# Altium PCB pcb.PcbDoc (part 2 of 2)
Units mm, origin at the board's own origin, x right, y up, seen from the top; angles counter-clockwise.
Board outline 343 x 129 mm, 4 copper layers (Top Layer, Layer 1 3V3, Layer 2 GND, Bottom Layer), stack 1.564 mm thick; 191 components, 119 nets, 712 pads, 390 vias.
Unrouted connection lines stored in the file: 301.
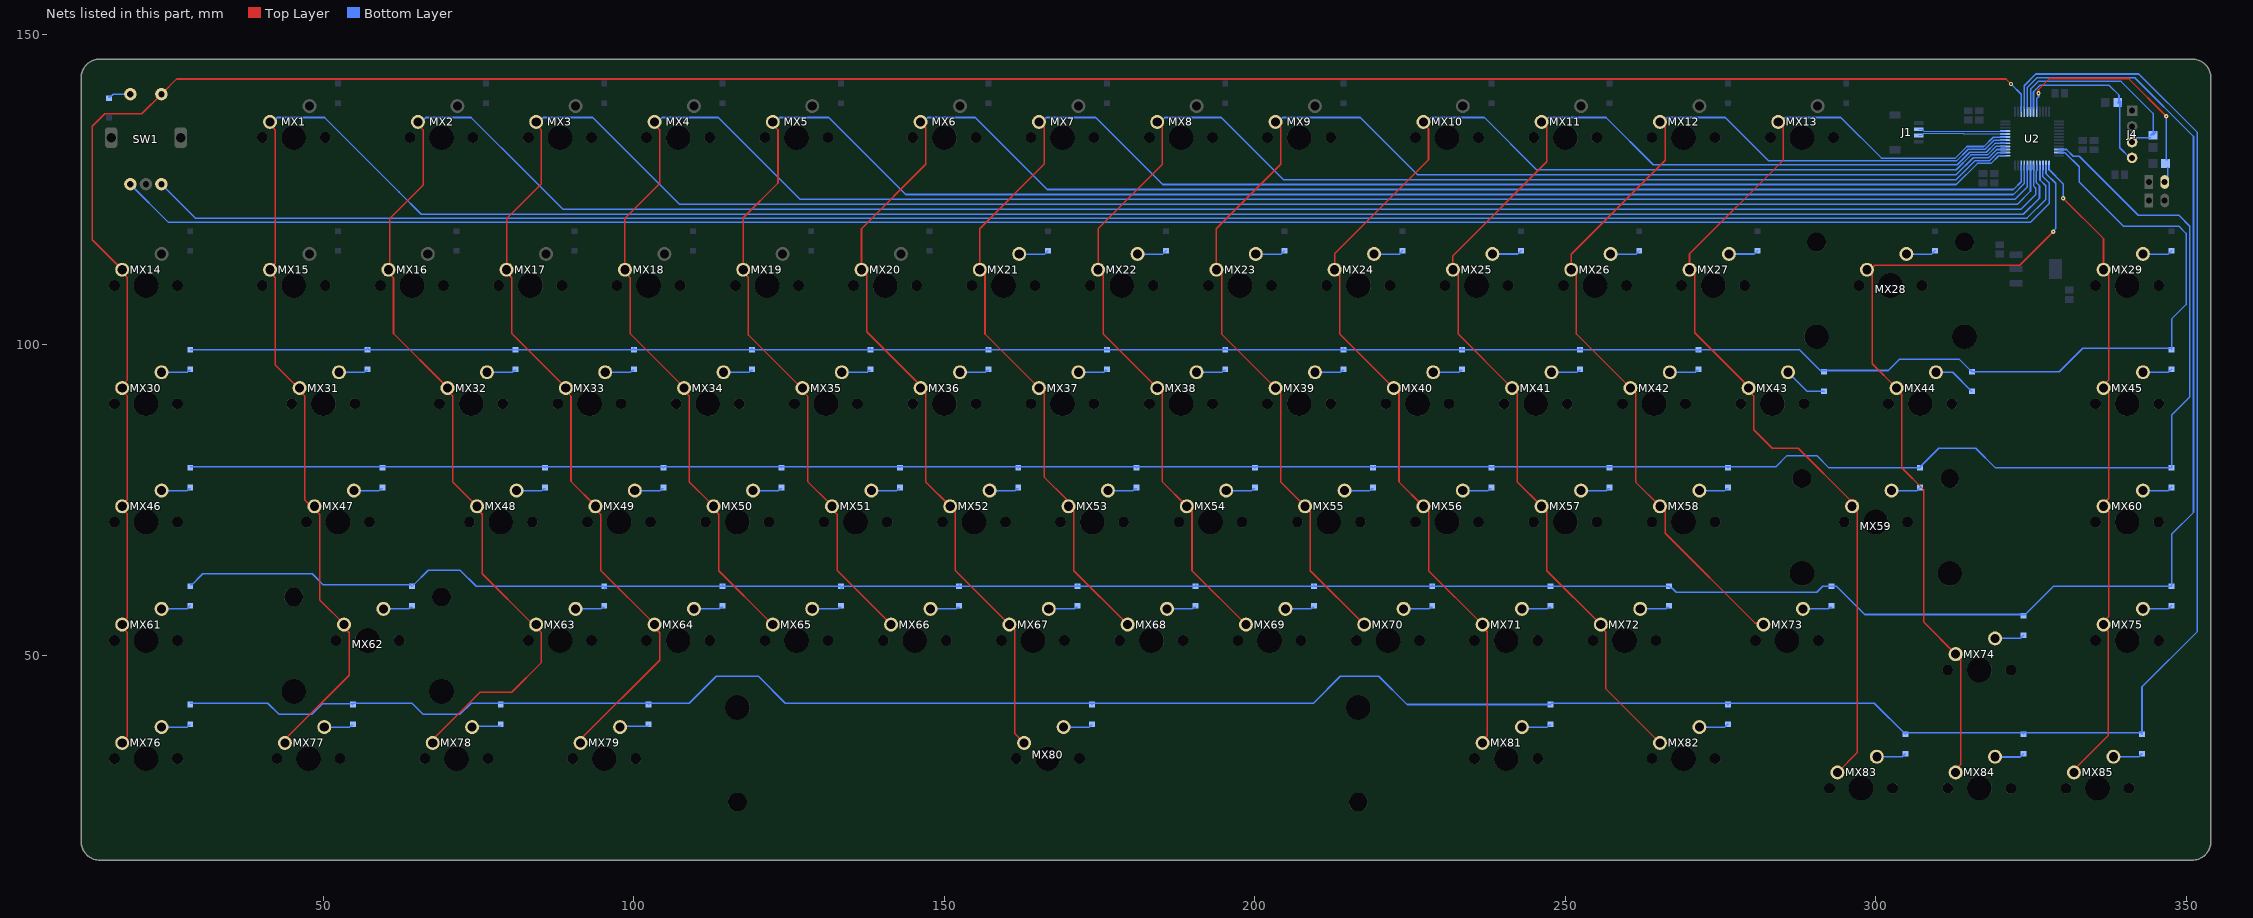
[diagram p4: the nets of this part, all layers, seen from the top]

## Via types
v1: diameter 0.7, hole 0.3, Layer 2 GND to Bottom Layer, tented both sides, 284 vias
v2: diameter 0.7, hole 0.3, Top Layer to Layer 2 GND, tented both sides, 91 vias
v3: diameter 0.7, hole 0.3, Layer 1 3V3 to Bottom Layer, tented both sides, 8 vias
v4: diameter 0.7, hole 0.3, Top Layer to Bottom Layer, tented both sides, 7 vias

## Nets (pads, with @x,y where several pads share a name; then routed paths per layer and width w, separated by ;. In a path a pad name is that pad's centre, name@x,y a point inside that pad or via, vN(x,y) a via of type N, cw(c..) or ccw(c..) an arc to the next point about the centre after c; other vN are vias at no path point) (continued)
NetD21_1: D21.1 MX21.2 | length 4.5
  Bottom Layer w0.254: MX21.2@162.52,114.3 162.82,114.6 166.181,114.6 166.339,114.758 166.339,114.783 166.663,115.106 D21.1@166.688,115.106
NetD22_1: D22.1 MX22.2 | length 4.7
  Bottom Layer w0.254: MX22.2@181.275,114.6 185.231,114.6 185.389,114.758 185.389,114.783 185.713,115.106 D22.1@185.737,115.106
NetD23_1: D23.1 MX23.2 | length 4.5
  Bottom Layer w0.254: MX23.2@200.62,114.3 200.92,114.6 204.281,114.6 204.439,114.758 204.439,114.783 204.763,115.106 D23.1@204.787,115.106
NetD24_1: D24.1 MX24.2 | length 4.7
  Bottom Layer w0.254: MX24.2@219.375,114.6 223.331,114.6 223.489,114.758 223.489,114.783 223.813,115.106 D24.1@223.837,115.106
NetD25_1: D25.1 MX25.2 | length 4.8
  Bottom Layer w0.254: MX25.2@238.284,114.617 242.391,114.617 242.539,114.766 242.539,114.783 242.863,115.106 D25.1@242.887,115.106
NetD26_1: D26.1 MX26.2 | length 4.7
  Bottom Layer w0.254: MX26.2@257.475,114.6 261.431,114.6 261.589,114.758 261.589,114.783 261.913,115.106 D26.1@261.938,115.106
NetD27_1: D27.1 MX27.2 | length 5.5
  Bottom Layer w0.254: MX27.2@275.629,114.3 MX27.2@276.113,114.783 ; MX27.2@276.384,114.617 280.491,114.617 280.639,114.766 280.639,114.783 280.963,115.106 D27.1@280.988,115.106
NetD28_1: D28.1 MX28.2 | length 4.7
  Bottom Layer w0.254: MX28.2@305.1,114.6 309.056,114.6 309.214,114.758 309.214,114.783 309.538,115.106 D28.1@309.562,115.106
NetD29_1: D29.1 MX29.2 | length 4.7
  Bottom Layer w0.254: MX29.2@343.2,114.6 347.156,114.6 347.314,114.758 347.314,114.783 347.638,115.106 D29.1@347.662,115.106
NetD30_1: D30.1 MX30.2 | length 4.7
  Bottom Layer w0.254: MX30.2@23.971,95.567 28.078,95.567 28.227,95.716 28.227,95.733 28.339,95.845 D30.1@28.575,95.845
NetD30_2: D30.2 D31.2 D32.2 D33.2 D34.2 D35.2 D36.2 D37.2 D38.2 D39.2 D40.2 D41.2 D42.2 D43.2 D44.2 D45.2 U2.11 | length 371.6
  Bottom Layer w0.254: D30.2@28.575,99.206 56.939,99.206 57.15,99.417 57.361,99.206 D32.2@80.963,99.206 99.802,99.206 D33.2@100.012,99.417 ; D33.2@100.013,99.206 118.852,99.206 D34.2@119.062,99.417 ; D34.2@119.063,99.206 137.902,99.206 D35.2@138.112,99.417 ; D35.2@138.113,99.206 156.952,99.206 D36.2@157.162,99.417 ; D36.2@157.163,99.206 176.001,99.206 D37.2@176.212,99.417 ; D37.2@176.213,99.206 195.051,99.206 D38.2@195.262,99.417 ; D38.2@195.263,99.206 214.101,99.206 D39.2@214.312,99.417 ; D39.2@214.313,99.206 233.151,99.206 D40.2@233.362,99.417 ; D40.2@233.363,99.206 252.201,99.206 D41.2@252.412,99.417 ; D41.2@252.413,99.206 271.078,99.206 D42.2@271.462,98.822 ; D42.2@271.463,99.206 287.747,99.206 291.108,95.845 302.019,95.845 303.805,97.631 313.494,97.631 315.28,95.845 D44.2@315.515,95.845 ; D44.2@315.516,95.634 329.574,95.634 333.357,99.417 D45.2@347.662,99.417 ; U2.11@329.523,130.945 329.532,130.936 330.506,130.936 332.779,128.663 332.779,126.206 339.923,119.062 348.853,119.062 350,117.915 350,106.471 347.663,104.133 D45.2@347.663,99.417 ; D45.2@347.663,99.206 D45.2@347.663,99.417
NetD31_1: D31.1 MX31.2 | length 4.7
  Bottom Layer w0.254: MX31.2@52.546,95.567 56.636,95.567 56.914,95.845 D31.1@57.15,95.845
NetD32_1: D32.1 MX32.2 | length 4.7
  Bottom Layer w0.254: MX32.2@76.359,95.567 80.449,95.567 80.726,95.845 D32.1@80.962,95.845
NetD33_1: D33.1 MX33.2 | length 4.7
  Bottom Layer w0.254: MX33.2@95.409,95.567 99.499,95.567 99.776,95.845 D33.1@100.012,95.845
NetD34_1: D34.1 MX34.2 | length 4.7
  Bottom Layer w0.254: MX34.2@114.459,95.567 118.549,95.567 118.826,95.845 D34.1@119.062,95.845
NetD35_1: D35.1 MX35.2 | length 4.7
  Bottom Layer w0.254: MX35.2@133.509,95.567 137.616,95.567 137.764,95.716 137.764,95.733 137.876,95.845 D35.1@138.112,95.845
NetD36_1: D36.1 MX36.2 | length 4.7
  Bottom Layer w0.254: MX36.2@152.559,95.567 156.649,95.567 156.926,95.845 D36.1@157.162,95.845
NetD37_1: D37.1 MX37.2 | length 4.7
  Bottom Layer w0.254: MX37.2@171.609,95.567 175.699,95.567 175.976,95.845 D37.1@176.212,95.845
NetD38_1: D38.1 MX38.2 | length 4.7
  Bottom Layer w0.254: MX38.2@190.659,95.567 194.749,95.567 195.026,95.845 D38.1@195.262,95.845
NetD39_1: D39.1 MX39.2 | length 4.7
  Bottom Layer w0.254: MX39.2@209.709,95.567 213.799,95.567 214.076,95.845 D39.1@214.312,95.845
NetD40_1: D40.1 MX40.2 | length 4.7
  Bottom Layer w0.254: MX40.2@228.759,95.567 232.849,95.567 233.126,95.845 D40.1@233.362,95.845
NetD41_1: D41.1 MX41.2 | length 4.7
  Bottom Layer w0.254: MX41.2@247.809,95.567 251.899,95.567 252.176,95.845 D41.1@252.412,95.845
NetD42_1: D42.1 MX42.2 | length 4.7
  Bottom Layer w0.254: MX42.2@266.859,95.567 270.966,95.567 271.114,95.716 271.114,95.733 271.226,95.845 D42.1@271.462,95.845
NetD43_1: D43.1 MX43.2 | length 7.1
  Bottom Layer w0.254: MX43.2@285.75,95.25 286.226,95.25 288.992,92.484 D43.1@291.703,92.484
NetD44_1: D44.1 MX44.2 | length 7.4
  Bottom Layer w0.254: MX44.2@309.562,95.25 309.88,95.567 312.408,95.567 315.491,92.484 D44.1@315.516,92.484
NetD45_1: D45.1 MX45.2 | length 4.6
  Bottom Layer w0.254: MX45.2@343.25,95.6 347.181,95.6 347.638,96.056 D45.1@347.662,96.056
NetD46_1: D46.1 MX46.2 | length 4.7
  Bottom Layer w0.254: MX46.2@23.971,76.517 28.078,76.517 28.227,76.666 28.227,76.683 28.339,76.795 D46.1@28.575,76.795
NetD46_2: D46.2 D47.2 D48.2 D49.2 D50.2 D51.2 D52.2 D53.2 D54.2 D55.2 D56.2 D57.2 D58.2 D59.2 D60.2 U2.10 | length 391.3
  Bottom Layer w0.254: D46.2@28.575,80.367 85.514,80.367 D48.2@85.725,80.156 85.936,80.367 104.564,80.367 D49.2@104.775,80.156 104.986,80.367 123.614,80.367 D50.2@123.825,80.156 ; D50.2@123.825,80.367 142.664,80.367 D51.2@142.875,80.156 ; D51.2@142.875,80.367 161.714,80.367 D52.2@161.925,80.156 162.136,80.367 180.764,80.367 D53.2@180.975,80.156 181.186,80.367 199.814,80.367 D54.2@200.025,80.156 200.236,80.367 218.864,80.367 D55.2@219.075,80.156 219.286,80.367 237.914,80.367 D56.2@238.125,80.156 238.336,80.367 256.964,80.367 D57.2@257.175,80.156 ; D57.2@257.175,80.367 276.014,80.367 D58.2@276.225,80.156 ; D58.2@276.225,80.367 283.964,80.367 285.75,82.153 290.512,82.153 292.509,80.156 307.181,80.156 307.181,80.367 310.158,83.344 316.111,83.344 319.298,80.156 D60.2@347.663,80.156 347.663,88.663 350.6,91.6 350.6,119.101 348.853,120.848 342.304,120.848 332.779,130.373 331.822,130.373 330.75,131.445 U2.10@329.523,131.445
NetD47_1: D47.1 MX47.2 | length 4.7
  Bottom Layer w0.254: MX47.2@54.927,76.517 59.018,76.517 59.295,76.795 D47.1@59.531,76.795
NetD48_1: D48.1 MX48.2 | length 4.7
  Bottom Layer w0.254: MX48.2@81.121,76.517 85.211,76.517 85.489,76.795 D48.1@85.725,76.795
NetD49_1: D49.1 MX49.2 | length 4.7
  Bottom Layer w0.254: MX49.2@100.171,76.517 104.261,76.517 104.539,76.795 D49.1@104.775,76.795
NetD50_1: D50.1 MX50.2 | length 4.7
  Bottom Layer w0.254: MX50.2@119.221,76.517 123.328,76.517 123.477,76.666 123.477,76.683 123.589,76.795 D50.1@123.825,76.795
NetD51_1: D51.1 MX51.2 | length 4.7
  Bottom Layer w0.254: MX51.2@138.271,76.517 142.361,76.517 142.639,76.795 D51.1@142.875,76.795
NetD52_1: D52.1 MX52.2 | length 4.7
  Bottom Layer w0.254: MX52.2@157.321,76.517 161.428,76.517 161.577,76.666 161.577,76.683 161.689,76.795 D52.1@161.925,76.795
NetD53_1: D53.1 MX53.2 | length 4.7
  Bottom Layer w0.254: MX53.2@176.371,76.517 180.461,76.517 180.739,76.795 D53.1@180.975,76.795
NetD54_1: D54.1 MX54.2 | length 4.7
  Bottom Layer w0.254: MX54.2@195.421,76.517 199.511,76.517 199.789,76.795 D54.1@200.025,76.795
NetD55_1: D55.1 MX55.2 | length 4.7
  Bottom Layer w0.254: MX55.2@214.471,76.517 218.561,76.517 218.839,76.795 D55.1@219.075,76.795
NetD56_1: D56.1 MX56.2 | length 4.7
  Bottom Layer w0.254: MX56.2@233.521,76.517 237.611,76.517 237.889,76.795 D56.1@238.125,76.795
NetD57_1: D57.1 MX57.2 | length 4.7
  Bottom Layer w0.254: MX57.2@252.571,76.517 256.678,76.517 256.827,76.666 256.827,76.683 256.939,76.795 D57.1@257.175,76.795
NetD58_1: D58.1 MX58.2 | length 4.7
  Bottom Layer w0.254: MX58.2@271.621,76.517 275.728,76.517 275.877,76.666 275.877,76.683 275.989,76.795 D58.1@276.225,76.795
NetD59_1: D59.1 MX59.2 | length 4.8
  Bottom Layer w0.254: MX59.2@302.577,76.517 306.684,76.517 306.833,76.666 306.833,76.683 307.156,77.006 D59.1@307.181,77.006
NetD60_1: D60.1 MX60.2 | length 4.8
  Bottom Layer w0.254: MX60.2@343.059,76.517 347.166,76.517 347.314,76.666 347.314,76.683 347.638,77.006 D60.1@347.662,77.006
NetD61_1: D61.1 MX61.2 | length 4.8
  Bottom Layer w0.254: MX61.2@23.971,57.468 28.078,57.468 28.227,57.616 28.227,57.633 28.55,57.956 D61.1@28.575,57.956
NetD61_2: D61.2 D62.2 D63.2 D64.2 D65.2 D66.2 D67.2 D68.2 D69.2 D70.2 D71.2 D72.2 D73.2 D74.2 D75.2 U2.41 | length 436.2
  Bottom Layer w0.254: D61.2@28.575,61.317 28.811,61.317 30.597,63.103 48.22,63.103 50.006,61.317 64.083,61.317 D62.2@64.294,61.106 ; D62.2@64.53,61.317 66.911,63.698 72.033,63.698 74.625,61.106 D63.2@95.25,61.106 ; D63.2@95.25,60.722 95.634,61.106 D64.2@114.3,61.106 ; D64.2@114.3,61.317 114.511,61.106 D65.2@133.35,61.106 ; D65.2@133.35,60.722 133.734,61.106 D66.2@152.4,61.106 ; D66.2@152.4,61.317 152.611,61.106 D67.2@171.45,61.106 ; D67.2@171.45,61.317 171.661,61.106 D68.2@190.5,61.106 ; D68.2@190.5,61.317 190.711,61.106 D69.2@209.55,61.106 ; D69.2@209.55,61.317 209.761,61.106 D70.2@228.6,61.106 ; D70.2@228.6,61.317 228.811,61.106 D71.2@247.65,61.106 ; D71.2@247.861,61.106 D72.2@266.7,61.106 ; D72.2@266.713,61.119 267.048,60.783 267.234,60.783 267.89,60.127 290.512,60.127 291.492,61.106 D73.2@292.894,61.106 293.694,61.106 298.245,56.555 324.086,56.555 328.638,61.106 D75.2@347.663,61.106 347.663,69.463 351.2,73 351.2,133.534 341.734,143 326,143 324.448,141.448 U2.41@324.448,138.116
NetD62_1: D62.1 MX62.2 | length 4.7
  Bottom Layer w0.254: MX62.2@59.69,57.468 63.78,57.468 64.058,57.745 D62.1@64.294,57.745
NetD63_1: D63.1 MX63.2 | length 4.7
  Bottom Layer w0.254: MX63.2@90.646,57.468 94.736,57.468 95.014,57.745 D63.1@95.25,57.745
NetD64_1: D64.1 MX64.2 | length 4.7
  Bottom Layer w0.254: MX64.2@109.696,57.468 113.803,57.468 113.952,57.616 113.952,57.633 114.064,57.745 D64.1@114.3,57.745
NetD65_1: D65.1 MX65.2 | length 4.7
  Bottom Layer w0.254: MX65.2@128.746,57.468 132.853,57.468 133.002,57.616 133.002,57.633 133.114,57.745 D65.1@133.35,57.745
NetD66_1: D66.1 MX66.2 | length 4.7
  Bottom Layer w0.254: MX66.2@147.796,57.468 151.903,57.468 152.052,57.616 152.052,57.633 152.164,57.745 D66.1@152.4,57.745
NetD67_1: D67.1 MX67.2 | length 4.7
  Bottom Layer w0.254: MX67.2@166.846,57.468 170.936,57.468 171.214,57.745 D67.1@171.45,57.745
NetD68_1: D68.1 MX68.2 | length 4.7
  Bottom Layer w0.254: MX68.2@185.896,57.468 189.986,57.468 190.264,57.745 D68.1@190.5,57.745
NetD69_1: D69.1 MX69.2 | length 4.7
  Bottom Layer w0.254: MX69.2@204.946,57.468 209.036,57.468 209.314,57.745 D69.1@209.55,57.745
NetD70_1: D70.1 MX70.2 | length 4.7
  Bottom Layer w0.254: MX70.2@223.996,57.468 228.086,57.468 228.364,57.745 D70.1@228.6,57.745
NetD71_1: D71.1 MX71.2 | length 4.7
  Bottom Layer w0.254: MX71.2@243.046,57.468 247.153,57.468 247.302,57.616 247.302,57.633 247.414,57.745 D71.1@247.65,57.745
NetD72_1: D72.1 MX72.2 | length 4.7
  Bottom Layer w0.254: MX72.2@262.096,57.468 266.186,57.468 266.464,57.745 D72.1@266.7,57.745
NetD73_1: D73.1 MX73.2 | length 4.7
  Bottom Layer w0.254: MX73.2@288.29,57.468 292.38,57.468 292.658,57.745 D73.1@292.894,57.745
NetD74_1: D74.1 MX74.2 | length 4.8
  Bottom Layer w0.254: MX74.2@319.246,52.705 323.353,52.705 323.502,52.854 323.502,52.871 323.825,53.194 D74.1@323.85,53.194
NetD75_1: D75.1 MX75.2 | length 4.8
  Bottom Layer w0.254: MX75.2@343.059,57.468 347.166,57.468 347.314,57.616 347.314,57.633 347.638,57.956 D75.1@347.662,57.956
NetD76_1: D76.1 MX76.2 | length 4.7
  Bottom Layer w0.254: MX76.2@23.971,38.417 28.061,38.417 28.339,38.695 D76.1@28.575,38.695
NetD76_2: D76.2 D77.2 D78.2 D79.2 D80.2 D81.2 D82.2 D83.2 D84.2 D85.2 U2.40 | length 464.3
  Bottom Layer w0.254: D76.2@28.575,42.267 41.077,42.267 42.862,40.481 48.152,40.481 49.871,42.2 54.625,42.2 D77.2@54.769,42.056 ; D77.2@54.769,42.267 64.294,42.267 66.08,40.481 72.033,40.481 73.819,42.267 102.183,42.267 D79.2@102.394,42.056 ; D79.2@102.394,42.267 108.942,42.267 113.275,46.6 120.087,46.6 124.42,42.267 173.62,42.267 D80.2@173.831,42.056 D80.2@173.831,42.26 ; D80.2@173.831,42.267 209.467,42.267 213.8,46.6 220,46.6 224.544,42.056 D81.2@247.65,42.056 247.861,42.267 276.014,42.267 D82.2@276.225,42.056 276.436,42.267 299.802,42.267 304.775,37.294 D83.2@304.8,37.294 305.011,37.505 323.639,37.505 D84.2@323.744,37.399 ; D84.2@323.85,37.294 D84.2@323.744,37.399 ; U2.40@323.925,138.112 323.925,141.725 325.8,143.6 342.4,143.6 351.829,134.171 351.829,53.829 342.9,44.9 D85.2@342.9,37.505 ; D85.2@342.9,37.294 342.689,37.505 323.85,37.505 D84.2@323.744,37.399
NetD77_1: D77.1 MX77.2 | length 4.7
  Bottom Layer w0.254: MX77.2@50.165,38.417 54.255,38.417 54.533,38.695 D77.1@54.769,38.695
NetD78_1: D78.1 MX78.2 | length 4.7
  Bottom Layer w0.254: MX78.2@73.977,38.417 74.143,38.583 78.469,38.583 D78.1@78.581,38.695
NetD79_1: D79.1 MX79.2 | length 4.7
  Bottom Layer w0.254: MX79.2@97.79,38.417 97.956,38.583 102.282,38.583 D79.1@102.394,38.695
NetD80_1: D80.1 MX80.2 | length 4.7
  Bottom Layer w0.254: MX80.2@169.227,38.417 173.318,38.417 173.595,38.695 D80.1@173.831,38.695
NetD81_1: D81.1 MX81.2 | length 4.7
  Bottom Layer w0.254: MX81.2@243.046,38.417 247.136,38.417 247.414,38.695 D81.1@247.65,38.695
NetD82_1: D82.1 MX82.2 | length 4.8
  Bottom Layer w0.254: MX82.2@271.621,38.417 275.728,38.417 275.877,38.566 275.877,38.583 276.2,38.906 D82.1@276.225,38.906
NetD83_1: D83.1 MX83.2 | length 4.8
  Bottom Layer w0.254: MX83.2@300.196,33.655 304.303,33.655 304.452,33.804 304.452,33.821 304.775,34.144 D83.1@304.8,34.144
NetD84_1: D84.1 MX84.2 | length 4.7
  Bottom Layer w0.254: MX84.2@319.35,33.6 323.306,33.6 323.502,33.796 323.502,33.821 323.825,34.144 D84.1@323.85,34.144
NetD85_1: D85.1 MX85.2 | length 4.8
  Bottom Layer w0.254: MX85.2@338.296,33.655 342.403,33.655 342.552,33.804 342.552,33.821 342.875,34.144 D85.1@342.9,34.144
NetD86_1: D86.1 SW1.S2 | length 3.6
  Bottom Layer w0.254: D86.1@15.478,139.898 15.714,139.898 16.166,140.35 SW1.S2@18.931,140.35
NetJ2_2: J2.2 R3.2 U2.44 | length 36.8
  Top Layer w0.254: v4(326.231,140.494) 326.231,141.089 328.017,142.875 340.725,142.875 v4(346.8,136.8)
  Bottom Layer w0.254: U2.44@325.971,138.112 325.971,139.639 326.231,139.898 v4(326.231,140.494) ; J2.2@346.551,126.206 346.551,126.412 347.067,126.928 R3.2@347.067,128.592 ; v4(346.8,136.8) 346.8,129.806 346.828,129.778 R3.2@347.067,129.778
NetJ4_3: J4.3 R1.1 U2.42 | length 34
  Bottom Layer w0.254: U2.42@324.971,138.112 324.971,141.171 326.2,142.4 339.535,142.4 344.686,137.25 R1.1@344.686,134.136 ; J4.3@341.3,132.628 341.387,132.628 342.109,133.35 R1.1@344.304,133.35 ; R1.1@344.304,133.755 R1.1@344.686,134.136 ; R1.1@344.686,134.136 R1.1@344.686,133.755 345.142,134.211 345.046,134.307 344.857,134.307 R1.1@344.686,134.136
NetJ4_4: J4.4 R2.1 U2.43 | length 30.5
  Bottom Layer w0.254: U2.43@325.425,138.112 325.425,140.738 326.487,141.8 337.6,141.8 339.2,140.2 339.2,139.2 R2.1@339,139 R2.1@339.328,138.672 ; R2.1@339.328,139.237 R2.1@339.328,138.672 ; R2.1@339.484,138.453 R2.1@339.484,139.237 ; R2.1@339.55,138.45 R2.1@339.328,138.672 ; J4.4@341.3,130.088 340.968,130.088 339.328,131.728 R2.1@339.328,138.672
NetMX1_1: MX1.1 MX15.1 MX31.1 MX47.1 MX62.1 MX77.1 U2.17 | length 408.4
  Top Layer w0.254: MX15.1@41.434,112.078 41.434,111.614 42.267,110.781 42.267,96.733 45.972,93.027 MX31.1@46.196,93.027 46.196,92.564 47.03,91.731 47.03,75.009 MX47.1@48.22,73.819 ; MX1.1@41.434,135.89 41.434,135.427 42.267,134.594 42.267,113.109 MX15.1@41.672,112.514 ; MX77.1@43.815,35.877 43.815,36.415 54.173,46.773 54.173,53.631 53.34,54.464 MX62.1@53.34,54.927 ; MX47.1@48.578,73.977 48.578,73.514 49.411,72.681 49.411,58.936 MX62.1@53.578,54.769
  Bottom Layer w0.254: MX1.1@41.434,135.89 41.871,135.89 42.581,136.6 50.2,136.6 62.2,124.6 65.8,121 323.8,121 326.4,123.6 326.4,125.6 325.902,126.098 325.902,127.975 325.925,127.998 325.925,128.16 325.948,128.183 U2.17@325.948,128.87
NetMX2_1: MX2.1 MX16.1 MX32.1 MX48.1 MX63.1 MX78.1 U2.18 | length 396
  Top Layer w0.254: MX16.1@60.484,112.078 60.484,111.614 61.317,110.781 61.317,101.798 MX32.1@69.652,93.464 ; MX16.1@60.722,111.919 60.722,120.322 66.08,125.68 66.08,134.594 65.246,135.427 MX2.1@65.246,135.89 ; MX78.1@67.627,35.877 67.627,36.418 68.163,36.954 68.163,36.963 75.253,44.053 80.367,44.053 85.13,48.816 85.13,53.631 84.296,54.464 MX63.1@84.296,54.769 ; MX32.1@70.009,93.027 70.009,92.564 70.842,91.731 70.842,77.907 74.414,74.335 MX48.1@74.414,73.819 ; MX48.1@74.771,73.977 74.771,73.514 75.605,72.681 75.605,63.103 83.939,54.769 MX63.1@84.296,54.769 ; MX63.1@84.296,54.927 MX63.1@84.296,54.769 ; MX63.1@84.534,54.769 MX63.1@84.296,54.769
  Bottom Layer w0.254: MX2.1@65.246,135.89 65.786,135.89 66.496,136.6 73.8,136.6 83.4,127 88.6,121.8 323.4,121.8 325.8,124.2 325.8,125.2 325.448,125.552 U2.18@325.448,128.87
NetMX3_1: MX3.1 MX17.1 MX33.1 MX49.1 MX64.1 MX79.1 U2.19 | length 370.4
  Top Layer w0.254: MX3.1@84.296,135.89 84.296,135.427 85.13,134.594 85.13,125.93 79.534,120.334 79.534,112.334 MX17.1@79.534,112.078 79.534,111.614 80.367,110.781 80.367,101.798 88.701,93.464 MX33.1@89.297,93.464 ; MX33.1@89.059,93.027 89.059,92.564 89.892,91.731 89.892,77.986 MX49.1@94.059,73.819 ; MX79.1@91.44,35.877 91.44,36.418 91.97,36.947 91.97,36.97 104.18,49.18 104.18,53.631 103.346,54.464 MX64.1@103.346,54.927 ; MX49.1@93.821,73.977 93.821,73.514 94.655,72.681 94.655,63.698 MX64.1@103.584,54.769
  Bottom Layer w0.254: MX3.1@84.296,135.89 84.733,135.89 85.443,136.6 93.4,136.6 102.8,127.2 107.4,122.6 322.8,122.6 324.948,124.748 U2.19@324.948,128.87
NetMX4_1: MX4.1 MX18.1 MX34.1 MX50.1 MX65.1 U2.20 | length 324.9
  Top Layer w0.254: MX4.1@103.346,135.89 103.346,135.427 104.18,134.594 104.18,125.98 98.584,120.384 MX18.1@98.584,112.078 98.584,111.614 99.417,110.781 99.417,101.798 MX34.1@108.347,92.869 ; MX34.1@108.109,93.027 108.109,92.564 108.942,91.731 108.942,77.907 112.514,74.335 MX50.1@112.514,73.819 ; MX50.1@112.871,73.977 112.871,73.514 113.705,72.681 113.705,63.619 122.039,55.285 MX65.1@122.039,54.769
  Bottom Layer w0.254: MX4.1@103.346,135.89 103.886,135.89 104.596,136.6 113.6,136.6 122.2,128 126.8,123.4 322.4,123.4 324.448,125.448 U2.20@324.448,128.87
NetMX5_1: MX5.1 MX19.1 MX35.1 MX51.1 MX66.1 U2.21 | length 302.9
  Top Layer w0.254: MX5.1@122.396,135.89 122.396,135.427 123.23,134.594 123.23,126.03 117.634,120.434 MX19.1@117.634,112.078 117.634,111.614 118.467,110.781 118.467,101.56 127,93.027 MX35.1@127.159,93.027 ; MX35.1@127.159,92.869 127.159,92.564 127.992,91.731 127.992,77.986 MX51.1@131.564,74.414 ; MX51.1@131.921,73.977 131.921,73.514 132.755,72.681 132.755,63.698 MX66.1@141.089,55.364
  Bottom Layer w0.254: MX5.1@122.396,135.89 122.833,135.89 123.543,136.6 131.4,136.6 141.8,126.2 143.8,124.2 322.2,124.2 323.948,125.948 U2.21@323.948,128.87
NetMX6_1: MX6.1 MX20.1 MX36.1 MX52.1 MX67.1 MX80.1 U2.22 | length 295.5
  Top Layer w0.254: MX20.1@136.684,112.078 136.684,118.698 147.042,129.056 147.042,135.136 ; 137.517,111.323 137.517,102.083 146.209,93.391 MX36.1@146.209,93.027 ; 147.042,92.273 147.042,77.907 MX52.1@150.971,73.977 ; 151.805,73.223 151.805,63.619 MX67.1@160.496,54.927 ; 161.33,54.173 161.33,37.425 MX80.1@162.877,35.877
  Bottom Layer w0.254: MX6.1@146.209,135.89 146.646,135.89 147.356,136.6 155,136.6 163.4,128.2 166.6,125 322.2,125 323.448,126.248 U2.22@323.448,128.87
NetMX7_1: MX7.1 MX21.1 MX37.1 MX53.1 MX68.1 U2.25 | length 253.4
  Top Layer w0.254: MX21.1@155.734,112.078 155.734,118.698 166.092,129.056 166.092,135.136 ; 156.567,111.323 156.567,101.719 MX37.1@165.259,93.027 ; 166.092,92.273 166.092,78.708 169.639,75.161 169.639,74.359 MX53.1@170.021,73.977 ; 170.855,73.223 170.855,63.619 MX68.1@179.546,54.927
  Bottom Layer w0.254: MX7.1@165.259,135.89 165.696,135.89 166.406,136.6 174.4,136.6 185.2,125.8 313,125.8 316.4,129.2 318.6,129.2 319.83,130.43 320.151,130.43 320.157,130.436 320.864,130.436 U2.25@320.873,130.445
NetMX8_1: MX8.1 MX22.1 MX38.1 MX54.1 MX69.1 U2.26 | length 233.4
  Top Layer w0.254: MX22.1@174.784,112.078 174.784,118.698 185.142,129.056 185.142,135.136 ; 175.617,111.323 175.617,101.719 MX38.1@184.309,93.027 ; 185.142,92.273 185.142,77.907 MX54.1@189.071,73.977 ; 189.905,73.223 189.905,63.619 MX69.1@198.596,54.927
  Bottom Layer w0.254: MX8.1@184.677,136.4 184.805,136.272 185.231,136.272 185.559,136.6 194.6,136.6 204.6,126.6 313,126.6 316.054,129.654 318.38,129.654 319.671,130.945 U2.26@320.873,130.945
NetMX9_1: MX9.1 MX23.1 MX39.1 MX55.1 MX70.1 U2.27 | length 213.9
  Top Layer w0.254: MX23.1@193.834,112.078 193.834,118.698 204.192,129.056 204.192,135.136 ; 194.667,111.323 194.667,101.719 MX39.1@203.359,93.027 ; 204.192,92.273 204.192,77.907 MX55.1@208.121,73.977 ; 208.955,73.223 208.955,63.619 MX70.1@217.646,54.927
  Bottom Layer w0.254: MX9.1@203.8,136 203.906,136 204.506,136.6 217,136.6 226.2,127.4 313,127.4 315.708,130.108 318.192,130.108 319.529,131.445 U2.27@320.873,131.445
NetMX10_1: MX10.1 MX24.1 MX40.1 MX56.1 MX71.1 MX81.1 U2.28 | length 212.2
  Top Layer w0.254: MX24.1@212.884,112.078 212.884,114.684 228,129.8 228,134.799 227.692,135.107 227.692,135.492 MX10.1@227.8,135.6 ; 213.717,111.323 213.717,101.719 MX40.1@222.409,93.027 ; 223.242,92.273 223.242,77.907 MX56.1@227.171,73.977 ; MX10.1@227.171,135.372 MX10.1@227.171,135.89 ; 228.004,73.223 228.004,63.619 MX71.1@236.696,54.927 ; MX81.1@236.696,35.877 236.696,36.261 237.459,37.024 237.459,53.781 237.156,54.084 237.156,54.466 MX71.1@237.459,54.769
  Bottom Layer w0.254: MX10.1@227.528,136.272 228.093,136.272 228.421,136.6 237,136.6 245.4,128.2 313,128.2 315.362,130.562 318.004,130.562 319.387,131.945 U2.28@320.873,131.945
NetMX11_1: MX11.1 MX25.1 MX41.1 MX57.1 MX72.1 MX82.1 U2.29 | length 195.1
  Top Layer w0.254: MX25.1@231.934,112.078 231.934,114.334 247.054,129.454 247.054,135.136 ; 232.767,111.323 232.767,101.719 MX41.1@241.459,93.027 ; 242.292,92.273 242.292,77.907 MX57.1@246.221,73.977 ; 247.054,73.223 247.054,63.619 MX72.1@255.746,54.927 ; MX72.1@256.509,54.769 256.206,54.466 256.206,54.084 256.509,53.781 256.509,44.639 MX82.1@265.271,35.877
  Bottom Layer w0.254: MX11.1@246.396,136.6 246.672,136.324 247.092,136.324 247.368,136.6 256.6,136.6 264.2,129 313.158,129 315.174,131.016 317.816,131.016 319.222,132.422 320.143,132.422 320.163,132.422 320.186,132.445 U2.29@320.873,132.445
NetMX12_1: MX12.1 MX26.1 MX42.1 MX58.1 MX73.1 U2.30 | length 157.4
  Top Layer w0.254: MX26.1@250.984,112.078 250.984,114.584 266.104,129.704 266.104,135.136 ; 251.817,111.323 251.817,101.719 MX42.1@260.509,93.027 ; 261.342,92.273 261.342,77.906 MX58.1@265.271,73.977 ; MX58.1@266.104,73.819 266.104,69.652 280.583,55.173 281.694,55.173 MX73.1@281.94,54.927
  Bottom Layer w0.254: MX12.1@265.271,135.89 265.708,135.89 266.418,136.6 275.8,136.6 282.8,129.6 313.042,129.6 314.912,131.47 317.628,131.47 319.08,132.922 320.143,132.922 320.163,132.922 320.186,132.945 U2.30@320.873,132.945
NetMX13_1: MX13.1 MX27.1 MX43.1 MX59.1 MX83.1 U2.31 | length 164.5
  Top Layer w0.254: MX27.1@270.034,112.078 270.034,114.634 285.154,129.754 285.154,135.136 ; 270.867,111.323 270.867,101.933 279.559,93.241 279.559,92.564 280.392,91.731 280.392,86.32 283.369,83.344 287.536,83.344 295.87,75.009 MX59.1@296.465,75.009 ; MX13.1@284.321,135.89 MX13.1@284.861,135.89 ; MX83.1@293.846,31.115 297.061,34.329 297.061,73.223 ; MX59.1@295.711,73.977 MX59.1@296.227,73.977
  Bottom Layer w0.254: MX13.1@284.321,135.89 284.758,135.89 285.468,136.6 294.4,136.6 300.946,130.054 312.854,130.054 314.724,131.924 317.44,131.924 318.938,133.422 320.143,133.422 320.163,133.422 320.186,133.445 U2.31@320.873,133.445
NetMX14_1: MX14.1 MX30.1 MX46.1 MX61.1 MX76.1 SW1.S1 U2.39 | length 421.1
  Top Layer w0.254: MX14.1@17,112.6 17,112.699 12.8,116.899 12.8,135.2 14.8,137.2 20.781,137.2 SW1.S1@23.931,140.35 26.381,142.8 321,142.8 v4(321.8,142) ; MX14.1@17.604,112.095 MX14.1@17.621,112.078 17.621,111.615 18.455,110.781 18.455,94.324 17.859,93.729 MX30.1@17.859,92.869 ; MX61.1@17.621,54.927 17.621,54.465 18.455,53.631 18.455,36.909 17.859,36.314 MX76.1@17.859,35.719 ; MX46.1@17.621,73.977 17.621,73.515 18.455,72.681 18.455,55.959 17.859,55.364 MX61.1@17.859,54.769 ; MX30.1@17.621,93.027 17.621,92.565 18.455,91.731 18.455,75.009 17.859,74.414 MX46.1@17.859,73.819
  Bottom Layer w0.254: v4(321.8,142) 323.448,140.352 323.448,137.621 U2.39@323.469,137.6
NetMX28_1: MX28.1 MX44.1 MX74.1 MX84.1 U2.14 | length 130
  Top Layer w0.254: MX28.1@298.609,112.078 299.149,112.078 299.871,112.8 323.2,112.8 v4(328.6,118.2) ; 299.442,111.323 299.442,96.957 MX44.1@303.371,93.027 ; MX44.1@304.039,93.664 304.039,93.193 304.204,93.027 303.897,92.72 303.897,92.249 304.204,91.941 304.204,80.196 307.776,76.624 307.776,55.285 MX74.1@312.896,50.165 ; MX84.1@312.896,31.115 312.896,31.578 313.729,32.412 313.729,49.411
  Bottom Layer w0.254: U2.14@327.448,128.87 327.448,127.552 329,126 329,118.721 328.6,118.321 v4(328.6,118.2)
NetMX29_1: MX29.1 MX45.1 MX60.1 MX75.1 MX85.1 U2.13 | length 102.5
  Top Layer w0.254: v4(330.2,123.6) 336.709,117.091 MX29.1@336.709,112.078 ; MX85.1@331.946,31.115 331.946,31.546 337.472,37.072 337.472,53.781 337.169,54.084 337.169,54.466 MX75.1@337.472,54.769 ; MX75.1@336.709,54.927 336.709,55.391 337.542,56.224 337.542,73.223 ; MX60.1@336.709,73.977 336.709,74.441 337.542,75.274 337.542,92.273 ; MX45.1@336.709,93.027 336.709,93.491 337.542,94.324 337.542,111.323
  Bottom Layer w0.254: U2.13@327.948,128.87 327.948,128.195 330.2,125.943 v4(330.2,123.6)
NetSW1_A: SW1.A U2.15 | length 319.4
  Bottom Layer w0.254: SW1.A@18.931,125.85 25.089,119.692 324.892,119.692 328,122.8 328,126 326.948,127.052 U2.15@326.948,128.87
NetSW1_B: SW1.B U2.16 | length 312.8
  Bottom Layer w0.254: SW1.B@23.931,125.85 29.381,120.4 324.4,120.4 327.4,123.4 327.4,125.6 326.471,126.529 326.471,128.16 326.448,128.183 U2.16@326.448,128.87
"USB D_N": J1.2 U2.32 | length 14.1
  Bottom Layer w0.155: J1.2@306.975,133.7 307.45,133.7 307.672,133.922 307.672,133.931 307.763,134.022 314.08,134.022 314.084,134.018 320.087,134.018 320.159,133.945 U2.32@320.873,133.945
"USB D_P": J1.3 U2.33 | length 14.1
  Bottom Layer w0.155: J1.3@306.975,134.7 307.45,134.7 307.672,134.478 307.672,134.469 307.763,134.378 314.227,134.378 314.232,134.373 320.087,134.373 320.159,134.445 U2.33@320.873,134.445
pads on no net: MX1.Un1 MX1.Un2 MX1.Un3 MX2.Un1 MX2.Un2 MX2.Un3 MX3.Un1 MX3.Un2 MX3.Un3 MX4.Un1 MX4.Un2 MX4.Un3 MX5.Un1 MX5.Un2 MX5.Un3 MX6.Un1 MX6.Un2 MX6.Un3 MX7.Un1 MX7.Un2 MX7.Un3 MX8.Un1 MX8.Un2 MX8.Un3 MX9.Un1 MX9.Un2 MX9.Un3 MX10.Un1 MX10.Un2 MX10.Un3 MX11.Un1 MX11.Un2 MX11.Un3 MX12.Un1 MX12.Un2 MX12.Un3 MX13.Un1 MX13.Un2 MX13.Un3 MX14.Un1 MX14.Un2 MX14.Un3 MX15.Un1 MX15.Un2 MX15.Un3 MX16.Un1 MX16.Un2 MX16.Un3 MX17.Un1 MX17.Un2 MX17.Un3 MX18.Un1 MX18.Un2 MX18.Un3 MX19.Un1 MX19.Un2 MX19.Un3 MX20.Un1 MX20.Un2 MX20.Un3 MX21.Un1 MX21.Un2 MX21.Un3 MX22.Un1 MX22.Un2 MX22.Un3 MX23.Un1 MX23.Un2 MX23.Un3 MX24.Un1 MX24.Un2 MX24.Un3 MX25.Un1 MX25.Un2 MX25.Un3 MX26.Un1 MX26.Un2 MX26.Un3 MX27.Un1 MX27.Un2 MX27.Un3 MX28.Un1 MX28.Un2 MX28.Un3 MX28.Un4 MX28.Un5 MX28.Un6 MX28.Un7 MX29.Un1 MX29.Un2 MX29.Un3 MX30.Un1 MX30.Un2 MX30.Un3 MX31.Un1 MX31.Un2 MX31.Un3 MX32.Un1 MX32.Un2 MX32.Un3 MX33.Un1 MX33.Un2 MX33.Un3 MX34.Un1 MX34.Un2 MX34.Un3 MX35.Un1 MX35.Un2 MX35.Un3 MX36.Un1 MX36.Un2 MX36.Un3 MX37.Un1 MX37.Un2 MX37.Un3 MX38.Un1 MX38.Un2 MX38.Un3 MX39.Un1 MX39.Un2 MX39.Un3 MX40.Un1 MX40.Un2 MX40.Un3 MX41.Un1 MX41.Un2 MX41.Un3 MX42.Un1 MX42.Un2 MX42.Un3 MX43.Un1 MX43.Un2 MX43.Un3 MX44.Un1 MX44.Un2 MX44.Un3 MX45.Un1 MX45.Un2 MX45.Un3 MX46.Un1 MX46.Un2 MX46.Un3 MX47.Un1 MX47.Un2 MX47.Un3 MX48.Un1 MX48.Un2 MX48.Un3 MX49.Un1 MX49.Un2 MX49.Un3 MX50.Un1 MX50.Un2 MX50.Un3 MX51.Un1 MX51.Un2 MX51.Un3 MX52.Un1 MX52.Un2 MX52.Un3 MX53.Un1 MX53.Un2 MX53.Un3 MX54.Un1 MX54.Un2 MX54.Un3 MX55.Un1 MX55.Un2 MX55.Un3 MX56.Un1 MX56.Un2 MX56.Un3 MX57.Un1 MX57.Un2 MX57.Un3 MX58.Un1 MX58.Un2 MX58.Un3 MX59.Un1 MX59.Un2 MX59.Un3 MX59.Un4 MX59.Un5 MX59.Un6 MX59.Un7 MX60.Un1 MX60.Un2 MX60.Un3 MX61.Un1 MX61.Un2 MX61.Un3 MX62.Un1 MX62.Un2 MX62.Un3 MX62.Un4 MX62.Un5 MX62.Un6 MX62.Un7 MX63.Un1 MX63.Un2 MX63.Un3 MX64.Un1 MX64.Un2 MX64.Un3 MX65.Un1 MX65.Un2 MX65.Un3 MX66.Un1 MX66.Un2 MX66.Un3 MX67.Un1 MX67.Un2 MX67.Un3 MX68.Un1 MX68.Un2 MX68.Un3 MX69.Un1 MX69.Un2 MX69.Un3 MX70.Un1 MX70.Un2 MX70.Un3 MX71.Un1 MX71.Un2 MX71.Un3 MX72.Un1 MX72.Un2 MX72.Un3 MX73.Un1 MX73.Un2 MX73.Un3 MX74.Un1 MX74.Un2 MX74.Un3 MX75.Un1 MX75.Un2 MX75.Un3 MX76.Un1 MX76.Un2 MX76.Un3 MX77.Un1 MX77.Un2 MX77.Un3 MX78.Un1 MX78.Un2 MX78.Un3 MX79.Un1 MX79.Un2 MX79.Un3 MX80.Un1 MX80.Un2 MX80.Un3 MX80.Un4 MX80.Un5 MX80.Un6 MX80.Un7 MX81.Un1 MX81.Un2 MX81.Un3 MX82.Un1 MX82.Un2 MX82.Un3 MX83.Un1 MX83.Un2 MX83.Un3 MX84.Un1 MX84.Un2 MX84.Un3 MX85.Un1 MX85.Un2 MX85.Un3 U2.2 U2.3 U2.4 U2.5 U2.6 U2.34 U2.37 U2.45 U2.46

## Polygon pours and split planes (outlines as drawn)
GND on Bottom Layer "GND_L04_P002" (solid, pour order 2): 351,146 cw(c351,142.993) 354,143.2 354,20 cw(c350.933,20.067) 351,17 14,17 cw(c14,20) 11,20 11,143.4 cw(c13.979,143) 13.8,146
GND on Bottom Layer "GND_L04_P003" (solid, pour order 3): 328,136 322.4,136 322.4,130.4 328,130.4
GND on Top Layer "GND_L01_P001" (solid, pour order 1): 14,146 ccw(c14,143) 11,143 11,20 ccw(c14,20) 14,17 351,17 ccw(c351,20) 354,20 354,143 ccw(c351,143) 351,146
GND on Layer 2 GND (split plane): 351.217,145.482 351.433,145.454 351.645,145.407 351.852,145.342 352.053,145.258 352.246,145.158 352.429,145.041 352.602,144.909 352.762,144.762 352.909,144.602 353.041,144.429 353.158,144.246 353.258,144.053 353.342,143.852 353.407,143.645 353.454,143.433 353.482,143.217 353.491,143.016 353.49,143 353.49,20 353.491,19.984 353.482,19.783 353.454,19.567 353.407,19.355 353.342,19.148 353.258,18.947 353.158,18.754 353.041,18.571 352.909,18.398 352.762,18.238 352.602,18.091 352.429,17.959 352.246,17.842 352.053,17.742 351.852,17.658 351.645,17.593 351.433,17.546 351.217,17.518 351.016,17.509 351,17.51 14,17.51 13.984,17.509 13.783,17.518 13.567,17.546 13.355,17.593 13.148,17.658 12.947,17.742 12.754,17.842 12.571,17.959 12.398,18.091 12.238,18.238 12.091,18.398 11.959,18.571 11.842,18.754 11.742,18.947 11.658,19.148 11.593,19.355 11.546,19.567 11.518,19.783 11.509,19.984 11.51,20 11.51,143 11.509,143.016 11.518,143.217 11.546,143.433 11.593,143.645 11.658,143.852 11.742,144.053 11.842,144.246 11.959,144.429 12.091,144.602 12.238,144.762 12.398,144.909 12.571,145.041 12.754,145.158 12.947,145.258 13.148,145.342 13.355,145.407 13.567,145.454 13.783,145.482 13.984,145.491 14,145.49 351,145.49 351.016,145.491
+3V3 on Layer 1 3V3 (split plane): 351.217,145.482 351.433,145.454 351.645,145.407 351.852,145.342 352.053,145.258 352.246,145.158 352.429,145.041 352.602,144.909 352.762,144.762 352.909,144.602 353.041,144.429 353.158,144.246 353.258,144.053 353.342,143.852 353.407,143.645 353.454,143.433 353.482,143.217 353.491,143.016 353.49,143 353.49,20 353.491,19.984 353.482,19.783 353.454,19.567 353.407,19.355 353.342,19.148 353.258,18.947 353.158,18.754 353.041,18.571 352.909,18.398 352.762,18.238 352.602,18.091 352.429,17.959 352.246,17.842 352.053,17.742 351.852,17.658 351.645,17.593 351.433,17.546 351.217,17.518 351.016,17.509 351,17.51 14,17.51 13.984,17.509 13.783,17.518 13.567,17.546 13.355,17.593 13.148,17.658 12.947,17.742 12.754,17.842 12.571,17.959 12.398,18.091 12.238,18.238 12.091,18.398 11.959,18.571 11.842,18.754 11.742,18.947 11.658,19.148 11.593,19.355 11.546,19.567 11.518,19.783 11.509,19.984 11.51,20 11.51,143 11.509,143.016 11.518,143.217 11.546,143.433 11.593,143.645 11.658,143.852 11.742,144.053 11.842,144.246 11.959,144.429 12.091,144.602 12.238,144.762 12.398,144.909 12.571,145.041 12.754,145.158 12.947,145.258 13.148,145.342 13.355,145.407 13.567,145.454 13.783,145.482 13.984,145.491 14,145.49 351,145.49 351.016,145.491

## Other copper
Bottom Layer:
  pour cut-out: 333.8,128.6 333.4,128.6 333.2,128.4 333.4,128.2 333.4,126 333.6,126 340,119.6 348.6,119.6 348.6,120.2 348.4,120.4 342,120.4
  pour cut-out: 332.2,128.2 331.6,128.2 331.6,125 337.8,118.8 339,118.8 339.2,119 332.4,125.8 332.4,126.6

## Silkscreen, mask and mechanical layers (free items; w line width, h text height)
Top Overlay:
  text ":)" at 350.454,18.454 h1.52
Bottom Overlay:
  text "JLCJLCJLCJLC" at 24.346,17.854 h1
Mechanical 1:
  lines w0.254: 354,143 ccw(c351,143) 351,146 14,146 ccw(c14,143) 11,143 11,20 ccw(c14,20) 14,17 350.935,17 ccw(c350.935,20.065) 354,20.065 354,143 ; 354,143 354,143 ; 354,143 354,143

## Text inside footprints (layer, text, board x,y; h text height)
J4: Mechanical 4 "SDA" at 338.775,131.192 h0.75 r270; Mechanical 4 "SCL" at 338.775,133.7 h0.75 r270; Mechanical 4 "VCC" at 338.775,136.293 h0.75 r270; Mechanical 4 "GND" at 338.775,138.815 h0.75 r270; Mechanical 4 "OLED Panel" at 319.931,133.248 h1